# Altium PCB Board.PcbDoc
Units mil, origin at the board's own origin, x right, y up, seen from the top; angles counter-clockwise.
Board outline 2230 x 4710 mil, 2 copper layers (Top Layer, Bottom Layer); 96 components, 75 nets, 376 pads, 28 vias.
Unrouted connection lines stored in the file: 83.
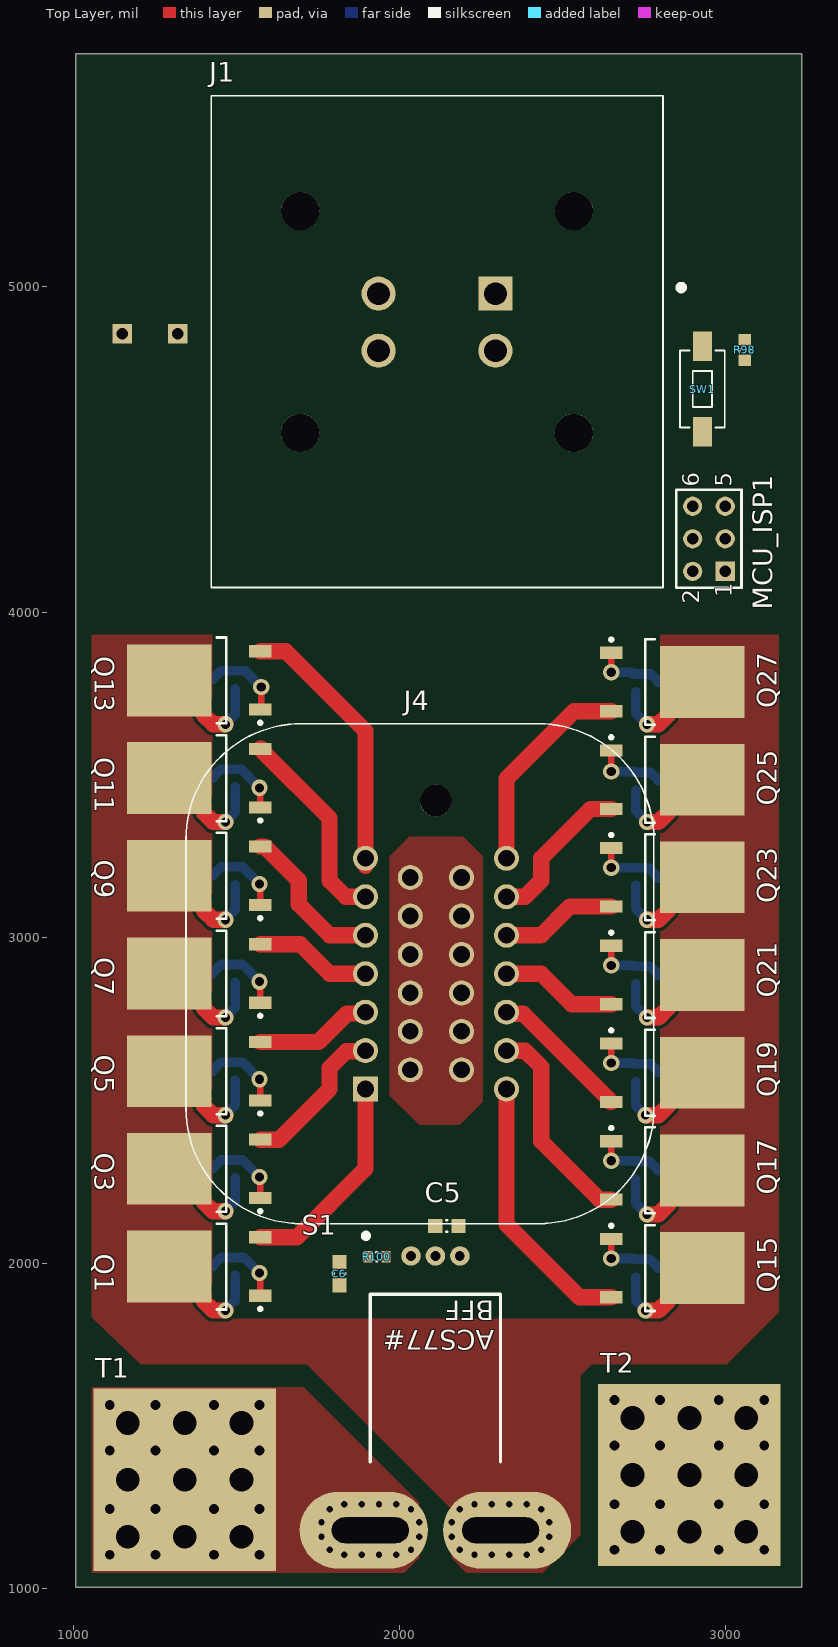
[diagram p0: Top Layer view]
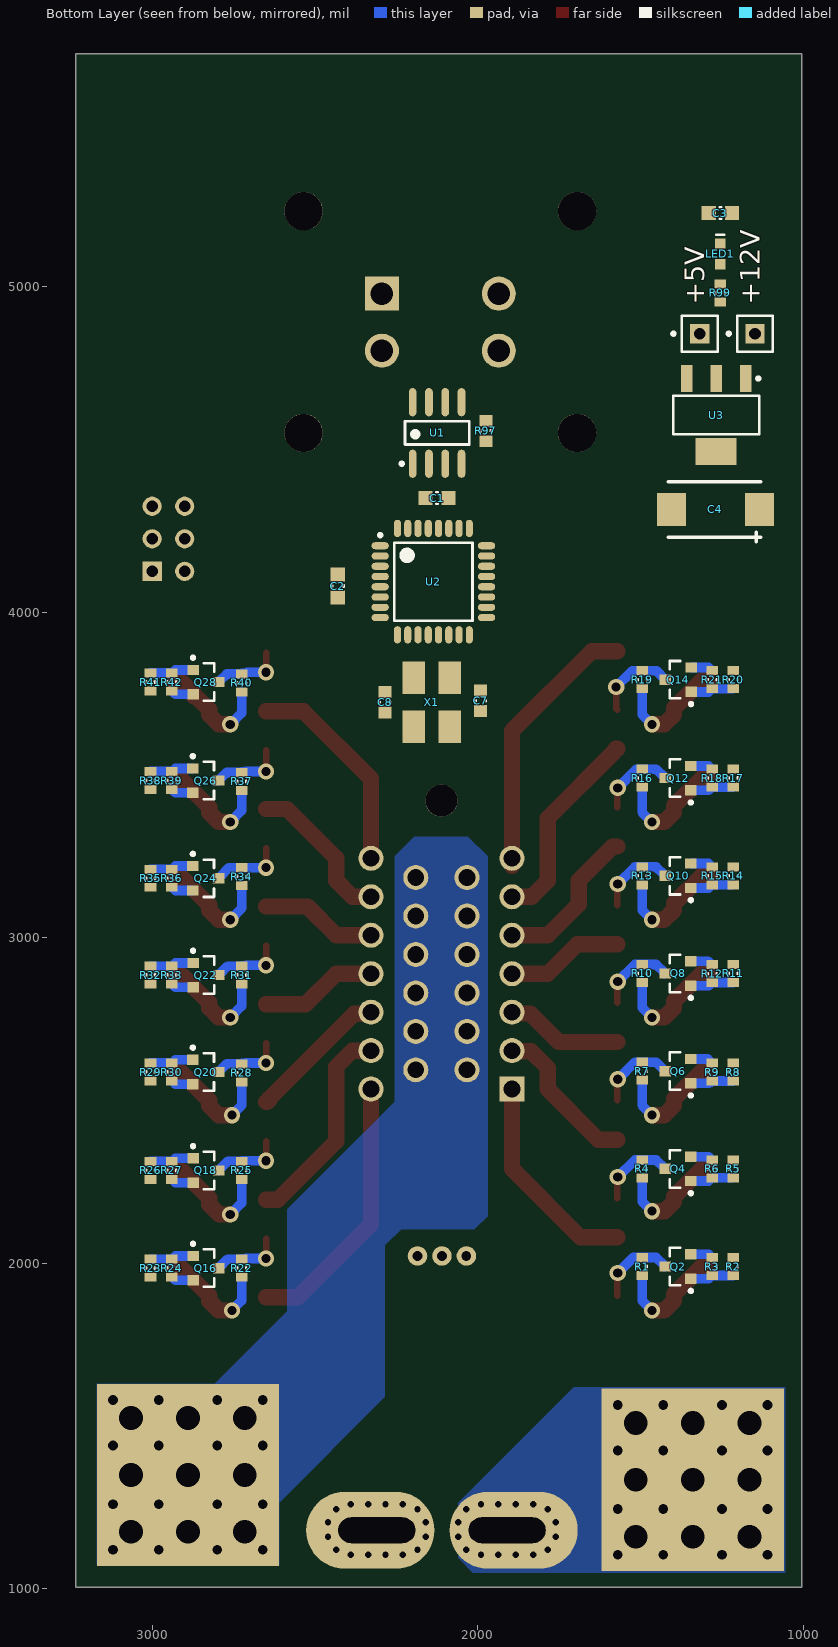
[diagram p1: Bottom Layer view, seen from below]

## Layer stack, top to bottom
Top Solder: solder mask 1, SM-003, Dk 4
Top Layer: signal copper 1.4
Dielectric 1: dielectric 12.6, FR-4, Dk 4.8
Bottom Layer: signal copper 1.4
Bottom Solder: solder mask 1, SM-003, Dk 4

## Board outline
1005,1005 3235,1005 3235,5715 1005,5715

## Design rules (kind name [scope] priority, off if disabled: settings)
Clearance [All] p1: gap=10 ignorepadtopadclearanceinfootprint=FALSE except(0: Arc-Hole Track-Hole SMDPad-Hole THPad-Hole Via-Hole Fill-Hole Poly-Hole Region-Hole Text-Hole)
PlaneConnect [All] p1: planeconnectstyle=Direct reliefexpansion=20 reliefentries=4 reliefconductorwidth=10 reliefairgap=10
PolygonConnect [All] p1: connectstyle=Direct reliefconductorwidth=10 reliefentries=4 polygonreliefangle="90 Angle" airgapwidth=10
RoutingVias [All] p1: holewidth=28 width=50 viastyle="Through Hole" minholewidth=28 minwidth=50 maxholewidth=28 maxwidth=50
SolderMaskExpansion [All] p1: expansion=4
Width [All] p1: maxlimit=50 minlimit=20 preferedwidth=30 minimp=50.000000 maximp=50.000000 favimp=50.000000
29 further rules are at their usual default settings.

## Classes and differential pairs
component class PowerSupply: +5V C3 C4 LED1 R99 U3
component class MOSFETs: Q1 Q2 Q3 Q4 Q5 Q6 Q7 Q8 Q9 Q10 Q11 Q12 Q13 Q14 Q15 Q16 Q17 Q18 Q19 Q20 Q21 Q22 Q23 Q24 Q25 Q26 Q27 Q28 R1 R2 R3 R4 R5 R6 R7 R8 R9 R10 R11 R12 R13 R14 R15 R16 R17 R18 R19 R20 R21 R22 R23 R24 R25 R26 R27 R28 R29 R30 R31 R32 R33 R34 R35 R36 R37 R38 R39 R40 R41 R42
component class MCU: C1 C2 C7 C8 MCU_ISP1 R97 R98 SW1 U1 U2 X1
component class ConnectorIn: +12V C5 C6 J1 R100 S1 T1 T2

## Components (designator, comment, footprint, x,y, rotation, side; value= is the part's Value field where it differs from the comment)
+5V "5v Supply" PIN1 1318.51,4855 r90 bottom (schematic designator J3)
+12V "12v Supply" PIN1 1148.51,4855 r90 bottom (schematic designator J2)
C1 "CAP 100nF 16V 0603(1608)" CAPC0603(1608)100_M 2125,4350 r180 bottom value=100nF
C2 "CAP 100nF 16V 0603(1608)" CAPC0603(1608)100_M 2430,4080 r90 bottom value=100nF
C3 "CAP 330nF 16V 0603(1608)" CAPC0603(1608)100_M 1255,5225 r0 bottom value=330nF
C4 "TantCap" "TantCap_2917 (7343)" 1270,4315 r0 bottom
C5 "CAP 100nF 16V 0603(1608)" CAPC0603(1608)100_M 2145,2115 r0 top value=100nF
C6 "CAP 10nF 16V 0603(1608)" CAPC0603(1608)100_M 1815,1967.99 r270 top value=10nF
C7 "CAP 22pF 16V 0603(1608)" CAPC0603(1608)100_N 1991.26,3727.61 r270 bottom value=22pF
C8 "CAP 22pF 16V 0603(1608)" CAPC0603(1608)100_N 2284.76,3723 r90 bottom value=22pF
J1 "DT15-4P" TE_DT15-4P 2114.92,4890.35 r180 top
J4 "6473418-1" TE_6473418-1 1895,2535 r90 top
LED1 "2V 30mA 0603 Green" 0603_A 1255,5100 r270 bottom
MCU_ISP1 "Header 3X2" HDR2X3 3000,4125 r90 top
Q1 "SPD30P06P G" INF-PG-TO252-3-1_N 1385,1990 r180 top
Q2 "NTR4501NT1G" ONSC-SOT-23-3-318-08_V 1385,1990 r0 bottom
Q3 "SPD30P06P G" INF-PG-TO252-3-1_N 1385,2290 r180 top
Q4 "NTR4501NT1G" ONSC-SOT-23-3-318-08_V 1385,2290 r0 bottom
Q5 "SPD30P06P G" INF-PG-TO252-3-1_N 1385,2590 r180 top
Q6 "NTR4501NT1G" ONSC-SOT-23-3-318-08_V 1385,2590 r0 bottom
Q7 "SPD30P06P G" INF-PG-TO252-3-1_N 1385,2890 r180 top
Q8 "NTR4501NT1G" ONSC-SOT-23-3-318-08_V 1385,2890 r0 bottom
Q9 "SPD30P06P G" INF-PG-TO252-3-1_N 1385,3190 r180 top
Q10 "NTR4501NT1G" ONSC-SOT-23-3-318-08_V 1385,3190 r0 bottom
Q11 "SPD30P06P G" INF-PG-TO252-3-1_N 1385,3490 r180 top
Q12 "NTR4501NT1G" ONSC-SOT-23-3-318-08_V 1385,3490 r0 bottom
Q13 "SPD30P06P G" INF-PG-TO252-3-1_N 1385,3790 r180 top
Q14 "NTR4501NT1G" ONSC-SOT-23-3-318-08_V 1384.37,3792.24 r0 bottom
Q15 "SPD30P06P G" INF-PG-TO252-3-1_N 2837.01,1985.24 r0 top
Q16 "NTR4501NT1G" ONSC-SOT-23-3-318-08_V 2835,1985 r180 bottom
Q17 "SPD30P06P G" INF-PG-TO252-3-1_N 2837.01,2285.24 r0 top
Q18 "NTR4501NT1G" ONSC-SOT-23-3-318-08_V 2835,2285 r180 bottom
Q19 "SPD30P06P G" INF-PG-TO252-3-1_N 2837.01,2585.24 r0 top
Q20 "NTR4501NT1G" ONSC-SOT-23-3-318-08_V 2835.63,2587.4 r180 bottom
Q21 "SPD30P06P G" INF-PG-TO252-3-1_N 2837.01,2885.24 r0 top
Q22 "NTR4501NT1G" ONSC-SOT-23-3-318-08_V 2835,2885 r180 bottom
Q23 "SPD30P06P G" INF-PG-TO252-3-1_N 2837.01,3185.24 r0 top
Q24 "NTR4501NT1G" ONSC-SOT-23-3-318-08_V 2835.63,3182.4 r180 bottom
Q25 "SPD30P06P G" INF-PG-TO252-3-1_N 2837.01,3485.24 r0 top
Q26 "NTR4501NT1G" ONSC-SOT-23-3-318-08_V 2835.63,3482.4 r180 bottom
Q27 "SPD30P06P G" INF-PG-TO252-3-1_N 2837.01,3785.24 r0 top
Q28 "NTR4501NT1G" ONSC-SOT-23-3-318-08_V 2835,3785 r180 bottom
R1 "1K 5% 0603(1608)" RESC0603(1608)_L 1495,1990 r270 bottom value="1000.00 Ohm"
R2 "10R 5% 0603" RESC0603(1608)_L 1215,1990 r90 bottom value="10.00 Ohm"
R3 "1K 5% 0603" RESC0603(1608)_L 1280,1990 r270 bottom value="1000.00 Ohm"
R4 "1K 5% 0603(1608)" RESC0603(1608)_L 1495,2290 r270 bottom value="1000.00 Ohm"
R5 "10R 5% 0603" RESC0603(1608)_L 1215.33,2290 r90 bottom value="10.00 Ohm"
R6 "1K 5% 0603" RESC0603(1608)_L 1280,2290 r270 bottom value="1000.00 Ohm"
R7 "1K 5% 0603(1608)" RESC0603(1608)_L 1495,2590 r270 bottom value="1000.00 Ohm"
R8 "10R 5% 0603" RESC0603(1608)_L 1215,2587.4 r90 bottom value="10.00 Ohm"
R9 "1K 5% 0603" RESC0603(1608)_L 1280,2587.4 r270 bottom value="1000.00 Ohm"
R10 "1K 5% 0603(1608)" RESC0603(1608)_L 1495,2890 r270 bottom value="1000.00 Ohm"
R11 "10R 5% 0603" RESC0603(1608)_L 1215,2890 r90 bottom value="10.00 Ohm"
R12 "1K 5% 0603" RESC0603(1608)_L 1280,2889.33 r270 bottom value="1000.00 Ohm"
R13 "1K 5% 0603(1608)" RESC0603(1608)_L 1495,3190 r270 bottom value="1000.00 Ohm"
R14 "10R 5% 0603" RESC0603(1608)_L 1215,3190 r90 bottom value="10.00 Ohm"
R15 "1K 5% 0603" RESC0603(1608)_L 1280,3190 r270 bottom value="1000.00 Ohm"
R16 "1K 5% 0603(1608)" RESC0603(1608)_L 1495,3490 r270 bottom value="1000.00 Ohm"
R17 "10R 5% 0603" RESC0603(1608)_L 1215,3490 r90 bottom value="10.00 Ohm"
R18 "1K 5% 0603" RESC0603(1608)_L 1280,3490 r270 bottom value="1000.00 Ohm"
R19 "1K 5% 0603(1608)" RESC0603(1608)_L 1495,3792.24 r270 bottom value="1000.00 Ohm"
R20 "10R 5% 0603" RESC0603(1608)_L 1215,3792.24 r90 bottom value="10.00 Ohm"
R21 "1K 5% 0603" RESC0603(1608)_L 1280,3792.24 r270 bottom value="1000.00 Ohm"
R22 "1K 5% 0603(1608)" RESC0603(1608)_L 2725,1985 r270 bottom value="1000.00 Ohm"
R23 "10R 5% 0603" RESC0603(1608)_L 3005,1985 r270 bottom value="10.00 Ohm"
R24 "1K 5% 0603" RESC0603(1608)_L 2940,1985 r90 bottom value="1000.00 Ohm"
R25 "1K 5% 0603(1608)" RESC0603(1608)_L 2725,2285 r270 bottom value="1000.00 Ohm"
R26 "10R 5% 0603" RESC0603(1608)_L 3005,2285 r270 bottom value="10.00 Ohm"
R27 "1K 5% 0603" RESC0603(1608)_L 2940,2285 r90 bottom value="1000.00 Ohm"
R28 "1K 5% 0603(1608)" RESC0603(1608)_L 2725,2585 r270 bottom value="1000.00 Ohm"
R29 "10R 5% 0603" RESC0603(1608)_L 3005,2587.4 r270 bottom value="10.00 Ohm"
R30 "1K 5% 0603" RESC0603(1608)_L 2940,2587.4 r90 bottom value="1000.00 Ohm"
R31 "1K 5% 0603(1608)" RESC0603(1608)_L 2725,2885 r270 bottom value="1000.00 Ohm"
R32 "10R 5% 0603" RESC0603(1608)_L 3005,2885 r270 bottom value="10.00 Ohm"
R33 "1K 5% 0603" RESC0603(1608)_L 2940,2885 r90 bottom value="1000.00 Ohm"
R34 "1K 5% 0603(1608)" RESC0603(1608)_L 2725,3187.44 r270 bottom value="1000.00 Ohm"
R35 "10R 5% 0603" RESC0603(1608)_L 3005,3182.4 r270 bottom value="10.00 Ohm"
R36 "1K 5% 0603" RESC0603(1608)_L 2940,3182.4 r90 bottom value="1000.00 Ohm"
R37 "1K 5% 0603(1608)" RESC0603(1608)_L 2725,3480 r270 bottom value="1000.00 Ohm"
R38 "10R 5% 0603" RESC0603(1608)_L 3005,3482.4 r270 bottom value="10.00 Ohm"
R39 "1K 5% 0603" RESC0603(1608)_L 2940,3482.4 r90 bottom value="1000.00 Ohm"
R40 "1K 5% 0603(1608)" RESC0603(1608)_L 2725,3782.4 r270 bottom value="1000.00 Ohm"
R41 "10R 5% 0603" RESC0603(1608)_L 3005,3785 r270 bottom value="10.00 Ohm"
R42 "1K 5% 0603" RESC0603(1608)_L 2940,3785 r90 bottom value="1000.00 Ohm"
R97 "10K 5% 0603(1608)" RESC0603(1608)_N 1975,4556.5 r90 bottom value="10000.00 Ohm"
R98 "10K 5% 0603(1608)" RESC0603(1608)_N 3060,4805 r270 top value="10000.00 Ohm"
R99 "100R 5% 0603(1608)" RESC0603(1608)_L 1255,4980 r90 bottom value="100.00 Ohm"
R100 "1K 5% 0603" RESC0603(1608)_L 1930,2020 r0 top value="1000.00 Ohm"
S1 "ACS77#" ACS77# 2110,1300 r180 top
SW1 "434111050826" 434111050826 2930,4685 r270 top
T1 "PowerScrewTerminal" WE_REDCUBE_74650195R 1340,1335 r0 top
T2 "PowerScrewTerminal" WE_REDCUBE_74650195R 2890,1350 r0 top
U1 "MCP2551-I/SN" SOIC-SN8_N 2125,4550 r90 bottom
U2 "ATmega64M1-AU" 32A_L 2136.26,4093.39 r180 bottom
U3 "LD1117S50TR" SOT-223_L 1267.96,4605 r270 bottom
X1 "CYRYSTAL_SMD-4" SMD-4_CRYSTAL_5x3.2mm 2141.26,3723 r270 bottom

## Footprints (in the part's own frame and the unit in brackets; to place one, negate y for a bottom-side part, rotate by r counter-clockwise, add the part's x,y. Pads: shape width x height; smd on the part's side, far side on the other; paste and mask are expansions set on the pad)
32A_L [mm] "Thin QFP, 32-Leads, Body 7x7mm, Pitch 0.8mm, IPC High Density"
  oval 1.35x0.55 smd: 1(-4.15,2.8) 2(-4.15,2) 3(-4.15,1.2) 4(-4.15,0.4) 5(-4.15,-0.4) 6(-4.15,-1.2) 7(-4.15,-2) 8(-4.15,-2.8) 17(4.15,-2.8) 18(4.15,-2) 19(4.15,-1.2) 20(4.15,-0.4) 21(4.15,0.4) 22(4.15,1.2) 23(4.15,2) 24(4.15,2.8)
  oval 0.55x1.35 smd: 9(-2.8,-4.15) 10(-2,-4.15) 11(-1.2,-4.15) 12(-0.4,-4.15) 13(0.4,-4.15) 14(1.2,-4.15) 15(2,-4.15) 16(2.8,-4.15) 25(2.8,4.15) 26(2,4.15) 27(1.2,4.15) 28(0.4,4.15) 29(-0.4,4.15) 30(-1.2,4.15) 31(-2,4.15) 32(-2.8,4.15)
  silkscreen extent -4.28,-3.05 3.05,3.75, body extent -3.5,-3.5 3.5,3.5, height 1.2
0603_A [mm] "Chip LED, 2-Leads, Body 1.6x0.8mm, IPC Medium Density"
  rect 0.8x0.8 smd: 1(-0.8,0) 2(0.8,0)
  silkscreen extent -1.5,-0.3 -1.5,0.3, body extent -0.8,-0.4 0.8,0.4, height 0.7
434111050826 [mm] "6.0*3.5mm vertical type, SMD, height 5.0mm, white actuator, 260gf, T&R"
  rect 2.3x1.5 smd: 1(-3.35,0) 2(3.35,0)
  silkscreen extent -3,-1.75 3,1.75, body extent -4,-1.75 4,1.75, height 5
ACS77# [mil]
  round 60 hole 30: 1(-75,-722.52) 2(0,-722.52) 3(75,-722.52)
  round 40 hole 19.68: 4(50,95) 4(50,140) 4(75,180) 4(75,55) 4(120,195) 4(120,40) 4(173.33,195) 4(173.33,40) 4(226.67,195) 4(226.67,40) 4(280,40) 4(280,195) 4(325,55) 4(325,180) 4(350,95) 4(350,140) 5(-350,95) 5(-350,140) 5(-325,55) 5(-325,180) 5(-280,40) 5(-280,195) 5(-226.67,195) 5(-226.67,40) 5(-173.33,195) 5(-173.33,40) 5(-120,195) 5(-120,40) 5(-75,180) 5(-75,55) 5(-50,95) 5(-50,140)
  oval 393.7x236.22 hole 78.74 slot 236.22 at 0 deg copper offset 20,0: 4(200,120)
  oval 393.7x236.22 hole 78.74 slot 236.22 at 0 deg copper offset -20,0: 5(-200,120)
  silkscreen extent -200,-605 200,-90, body extent -280,-605 280,140, height 275
CAPC0603(1608)100_M [mm] "Chip Capacitor, Body 1.6x0.8mm, Height 1.0mm, IPC Low Density"
  rect 1.1x1.1 smd: 1(-0.9,0) 2(0.9,0)
  silkscreen extent -0.05,-0.45 0.05,0.45, body extent -0.87,-0.47 0.88,0.48, height 1
CAPC0603(1608)100_N [mm] "Chip Capacitor, Body 1.6x0.8mm, Height 1.0mm, IPC Medium Density"
  rect 0.9x1 smd: 1(-0.8,0) 2(0.8,0)
  silkscreen extent -0.05,-0.4 0.05,0.4, body extent -0.87,-0.48 0.88,0.47, height 1
HDR2X3 [mm] "Connector; Header; 3x2 Position"
  rect 1.5x1.5 hole 0.9: 1(0,0)
  round 1.5 hole 0.9: 2(0,2.54) 3(2.54,0) 4(2.54,2.54) 5(5.08,0) 6(5.08,2.54)
  silkscreen extent -1.27,-1.27 6.35,3.81
INF-PG-TO252-3-1_N [mm] "DPAK, 3-Leads, Body 6.525x6.12mm, Pitch 2.28mm, IPC Medium Density"
  rect 1.75x0.95 smd: 1(-4.75,2.28) 3(-4.75,-2.28)
  rect 6.6x5.6 smd: 2(2.35,0)
  silkscreen extent -4.87,-3.35 -1.35,3.43, body extent -2.1,-3.32 4.12,3.32, height 2.35
ONSC-SOT-23-3-318-08_V [mm] "SOT23, 3-Leads, Body 2.92x1.3mm, Pitch 0.95mm"
  rect 0.9x0.8 smd: 1(-1,0.95) 2(-1,-0.95) 3(1,0)
  silkscreen extent -1.12,-1.46 0.65,2.02, body extent -0.65,-1.46 0.65,1.46, height 1.11
PIN1 [mm] "Connector; Plug"
  rect 1.5x1.5 hole 0.9: 1(0,0)
  silkscreen extent -1.4,-1.4 1.4,2.18
RESC0603(1608)_L [mm] "Chip Resistor, Body 1.6x0.8mm, IPC High Density"
  rect 0.7x0.9 smd: 1(-0.7,0) 2(0.7,0)
  silkscreen extent -0.05,-0.35 0.05,0.35, body extent -0.85,-0.47 0.85,0.47, height 0.6
RESC0603(1608)_N [mm] "Chip Resistor, Body 1.6x0.8mm, IPC Medium Density"
  rect 0.9x1 smd: 1(-0.8,0) 2(0.8,0)
  silkscreen extent -0.05,-0.4 0.05,0.4, body extent -0.85,-0.47 0.85,0.47, height 0.6
SMD-4_CRYSTAL_5x3.2mm [mil]
  rect 100x70 smd: 1(-75,-55) 2(75,-55) 3(75,55) 4(-75,55)
  body extent -98,-63 98,63, height 47
SOIC-SN8_N [mm] "SOIC, 8-Leads, Body 4.9x3.9mm, Pitch 1.27mm, IPC Medium Density"
  oval 2.2x0.6 smd: 1(-2.4,1.905) 2(-2.4,0.635) 3(-2.4,-0.635) 4(-2.4,-1.905) 5(2.4,-1.905) 6(2.4,-0.635) 7(2.4,0.635) 8(2.4,1.905)
  silkscreen extent -2.52,-2.5 0.9,2.88, body extent -2,-2.5 2,2.5, height 1.75
SOT-223_L [mm] "SOT223, 4-Leads, Body 6.5x3.5mm, Pitch 2.3mm, Lead Span 7mm, IPC High Density"
  rect 2.1x0.9 smd: 1(-2.85,2.3) 2(-2.85,0) 3(-2.85,-2.3)
  rect 2.1x3.2 smd: 4(2.85,0)
  silkscreen extent -2.97,-3.35 1.5,3.42, body extent -1.85,-3.35 1.85,3.35, height 1.8
"TantCap_2917 (7343)" [mil]
  rect 90x100 smd: 1(-135,0) 2(135,0)
  silkscreen extent -140,-85 145,100, body extent -140,-85 145,85, height 120
TE_6473418-1 [mm]
  rect 1.95x1.95 hole 1.3: 1(0,0)
  round 1.95 hole 1.3: 2(3,0) 3(6,0) 4(9,0) 5(12,0) 6(15,0) 7(18,0) 8(1.5,-3.5) 9(4.5,-3.5) 10(7.5,-3.5) 11(10.5,-3.5) 12(13.5,-3.5) 13(16.5,-3.5) 14(1.5,-7.5) 15(4.5,-7.5) 16(7.5,-7.5) 17(10.5,-7.5) 18(13.5,-7.5) 19(16.5,-7.5) 20(0,-11) 21(3,-11) 22(6,-11) 23(9,-11) 24(12,-11) 25(15,-11) 26(18,-11)
  round 2.5 hole 2.5 unplated: None(22.5,-5.5)
  silkscreen extent -11.65,-22.5 28.5,14, body extent -10.55,-22.46 28.45,14.04, height 24.6
TE_DT15-4P [mm]
  rect 2.655x2.655 hole 1.77: 1(-4.56,-2.225)
  round 2.655 hole 1.77: 2(-4.56,2.225) 3(4.56,2.225) 4(4.56,-2.225)
  round 2.99 hole 2.99 unplated: None(-10.67,8.645) None(-10.67,-8.655) None(10.67,8.645) None(10.67,-8.655)
  silkscreen extent -19.25,-17.65 17.62,20.7, body extent -17.63,-17.65 17.63,20.7, height 30.48
WE_REDCUBE_74650195R [mil] "Uses the https://au.rs-online.com/web/p/power-element-bushes/1424113/"
  round 60 hole 30: 1(-230,-230) 1(-230,-90) 1(-230,90) 1(-230,230) 1(-90,-230) 1(-90,-90) 1(-90,90) 1(-90,230) 1(90,-230) 1(90,-90) 1(90,90) 1(90,230) 1(230,-230) 1(230,-90) 1(230,90) 1(230,230)
  round 125.98 hole 72.83: 1(-174.61,-174.61) 1(-174.61,0) 1(-174.61,174.61) 1(0,-174.61) 1(0,0) 1(0,174.61) 1(174.61,-174.61) 1(174.61,0) 1(174.61,174.61)
  rect 560x560 all layers, no hole: 1(0,0)
  body extent -197,-197 197,197, height 276

## Part data
+5V +12V: library part Socket, "Socket", LatestRevisionDate=17-Jul-2002, LatestRevisionNote="Re-released for DXP Platform.", Publisher="Altium Limited"
C1 C2 C5: library part CMP-1035-02583-1, "CAP 100nF 16V ±5% 0603 (1608 Metric) Thickness 1mm SMD", Case-EIA=0603, Case-Metric=1608, Rated Voltage="16 V", Tolerance=±5%, Max Thickness="1 mm", Technology=SMT
C3: library part CMP-1035-02670-1, "CAP 330nF 16V ±5% 0603 (1608 Metric) Thickness 1mm SMD", Case-EIA=0603, Case-Metric=1608, Rated Voltage="16 V", Tolerance=±5%, Max Thickness="1 mm", Technology=SMT
C6: library part CMP-1035-02310-1, "CAP 10nF 16V ±5% 0603 (1608 Metric) Thickness 1mm SMD", Case-EIA=0603, Case-Metric=1608, Rated Voltage="16 V", Tolerance=±5%, Max Thickness="1 mm", Technology=SMT
C7 C8: library part CMP-1035-00808-1, "CAP 22pF 16V ±5% 0603 (1608 Metric) Thickness 1mm SMD", Case-EIA=0603, Case-Metric=1608, Rated Voltage="16 V", Tolerance=±5%, Max Thickness="1 mm", Technology=SMT
J1: "DT Series 4 Position 16 AWG Flange Mount Male Pin Through Hole Receptacle Header", Package=None, Digi-Key_Part_Number=1734-1030-ND, Digi-Key_Purchase_URL=https://www.digikey.com/product-detail/en/te-connectivity-deutsch-connectors/DT15-4P/1734-1030-ND/6566594?utm_source=snapeda&utm_medium=aggregator&utm_campaign=symbol, MF="TE Connectivity", MP=DT15-4P, SnapEDA_Link=https://www.snapeda.com/parts/DT15-4P/TE%20Connectivity%20Deutsch%20Connectors/view-part/?ref=snap, TE_purchase_URL=https://www.te.com/usa-en/product-DT15-4P.html?te_bu=Cor&te_type=disp&te_campaign=seda_glo_cor-seda-global-disp-prtnr-fy19-seda-model-bom-cta_sma-317_1&elqCampaignId=32493
J4: "Conn Shrouded Header PIN 26 POS 3mm Solder ST Thru-Hole Automotive Tube", Package=None, Digi-Key_Part_Number=A121634-ND, Digi-Key_Purchase_URL=https://www.digikey.com/product-detail/en/te-connectivity-amp-connectors/6473418-1/A121634-ND/2329277?utm_source=snapeda&utm_medium=aggregator&utm_campaign=symbol, EU_RoHS_Compliance=Compliant, MF="TE Connectivity", MP=6473418-1, SnapEDA_Link=https://www.snapeda.com/parts/6473418-1/TE%20Connectivity%20AMP%20Connectors/view-part/?ref=snap, TE_purchase_URL=https://www.te.com/usa-en/product-6473418-1.html?te_bu=Cor&te_type=disp&te_campaign=seda_glo_cor-seda-global-disp-prtnr-fy19-seda-model-bom-cta_sma-317_1&elqCampaignId=32493
LED1: library part CMP-1426-00006-1, "SMD mono-color Chip LED, WL-SMCW, Bright Green", Color="Bright Green", Manufacturer="Wuerth Elektronik", PartNumber=150060VS75000, ComponentLink1Description="Manufacturer URL", ComponentLink1URL=http://www.we-online.com, ComponentLink2Description=Datasheet, ComponentLink2URL=http://katalog.we-online.com/led/datasheet/150060VS75000.pdf, PackageReference=0603_A
MCU_ISP1: "Header, 3-Pin, Dual row", LatestRevisionDate=17-Jul-2002, LatestRevisionNote="Re-released for DXP Platform.", Publisher="Altium Limited"
Q1 Q3 Q5 Q7 Q9 Q11 Q13 Q15 Q17 Q19 Q21 Q23 Q25 Q27: library part CMP-1099-00058-1, "P-Channel SIPMOS Power-Transistor, -60 V VDS, -30 A ID, -55 to 175 degC, PG-TO252-3-1, Reel, Green", Manufacturer=Infineon, ComponentLink1Description="Manufacturer URL", ComponentLink1URL=http://www.infineon.com/, ComponentLink2Description=Datasheet, ComponentLink2URL=http://www.infineon.com/dgdl/SPD30P06P_Rev.2.3_pdf.pdf?folderId=db3a30431ed1d7b2011f4042f2ff4ec5&fileId=db3a30431ed1d7b2011f404fbc7e4ef4, ComponentLink3Description="Package Specification", ComponentLink3URL=http://www.infineon.com/dgdl/TLE42744_DS_11.pdf?folderId=db3a304318f3fe290118f5a433570040&fileId=db3a304327b897500128012ccafe37d2&sId=db3a30443d67b5ca013d83f7c0ea327b, DatasheetVersion="Rev. 2.3", Green=TRUE, ID (max)="-30 A", IDpuls (max)="-120 A", Mounting Technology="Surface Mount", PackageDescription="3-Pin Plastic (Green) Transistor Single Outline Package, 6.5 x 6.12 mm Body, 2.28 mm Pitch", PackageReference=PG-TO252-3-1, PackageVersion=Jan-10, Packing=Reel, PartNumber="SPD30P06P G", Pto t (max)="125 W", QG="32 nC", RDS (on) (max)="75 mOhm", Rth="1.2 K/W", RthJC (max)="1.2 K/W", VDS (max)="-60 V", VGS(th) (max)="-4 V", VGS(th) (min)="-2.1 V"
Q2 Q4 Q6 Q8 Q10 Q12 Q14 Q16 Q18 Q20 Q22 Q24 Q26 Q28: library part CMP-1058-00732-1, "Power MOSFET, 20 V, 3.2 A, Single N-Channel, 3-Pin SOT-23, Pb-Free, Tape and Reel", Manufacturer="On Semiconductor", Package Type=SOT-23-3, Channel Polarity="N Channel", Ciss Typ (pF)=200, ComponentLink1Description="Manufacturer URL", ComponentLink1URL=http://www.onsemi.com/, ComponentLink2Description=Datasheet, ComponentLink2URL=http://www.onsemi.cn/pub_link/Collateral/NTR4501N-D.PDF, ComponentLink3Description="Package Specification", ComponentLink3URL=http://www.onsemi.cn/pub_link/Collateral/318-08.PDF, Configuration=Single, Coss Typ (pF)=80, Crss Typ (pF)=50, DatasheetVersion="Rev. 13", Mounting Technology="Surface Mount", PackageDescription="3-Pin Small Outline Transistor, Body 2.92 x 1.3 mm, Pitch 0.95 mm", PackageReference=SOT-23-3-318-08, PackageVersion="Rev. AP, 11/2009", Packing="Tape and Reel", PartNumber=NTR4501NT1G, PD Max (W)=1.25, Qrr Typ (nC)=3, RoHS=Pb-Free, V(BR)DSS Min (V)=20, VGS(th) Max (V)=1.2, VGS Max (V)=12
R1 R3 R4 R6 R7 R9 R10 R12 R13 R15 R16 R18 R19 R21 R22 R24 R25 R27 R28 R30 R31 R33 R34 R36 R37 R39 R40 R42 R100: library part CMP-1012-00074-1, "1K 0.1W 5% 0603 (1608 Metric)  SMD", Case-EIA=0603, Case-Metric=1608, Power="0.1 W", Tolerance="5 %", Technology=SMT
R2 R5 R8 R11 R14 R17 R20 R23 R26 R29 R32 R35 R38 R41: library part CMP-1012-00026-1, "10R 0.1W 5% 0603 (1608 Metric)  SMD", Case-EIA=0603, Case-Metric=1608, Power="0.1 W", Tolerance="5 %", Technology=SMT
R97 R98: library part CMP-1012-00098-1, "10K 0.1W 5% 0603 (1608 Metric)  SMD", Case-EIA=0603, Case-Metric=1608, Power="0.1 W", Tolerance="5 %", Technology=SMT
R99: library part CMP-1012-00050-1, "100R 0.1W 5% 0603 (1608 Metric)  SMD", Case-EIA=0603, Case-Metric=1608, Power="0.1 W", Tolerance="5 %", Technology=SMT
SW1: library part CMP-1459-00003-1, "WS-TASV SMD Tact Switch 6.0X3.5 mm", Manufacturer="Wuerth Elektronik", ComponentLink1Description="Manufacturer URL", ComponentLink1URL=http://www.we-online.com, ComponentLink2Description=Datasheet, ComponentLink2URL=http://katalog.we-online.de/em/datasheet/434111050826.pdf, NoPins=02, PackageReference=434111050826, PartNumber=434111050826
U1: library part CMP-0186-00138-2, "High-Speed CAN Transceiver, 8-Pin SOIC, Industrial Temperature", Code_IPC=SOIC127P600-8, Code_JEDEC=MS-012, ComponentLink1Description="Manufacturer URL", ComponentLink1URL=http://www.microchip.com/, ComponentLink2Description=Datasheet, ComponentLink2URL=http://ww1.microchip.com/downloads/en/DeviceDoc/21667F.pdf, ComponentLink3Description="Package Specification", ComponentLink3URL=http://www.microchip.com/stellent/groups/techpub_sg/documents/packagingspec/en012702.pdf, DatasheetVersion="revF, Jul-2010", PackageDescription="8-Lead Plastic Small Outline (SN) - Narrow, 3.90mm Body [SOIC]", PackageReference=SOIC-SN8, PackageVersion="revBB, Aug-2009", RevisionNote="URLs added. DatasheetVersion updated."
U2: library part CMP-0096-00131-2, "8-bit AVR Microcontroller, 2.7-5.5V, 16MHz, 64KB Flash, 2KB EEPROM, 4KB SRAM, Industrial Grade (-40° to +85°C), 32-Pin TQFP", Code_JEDEC=MS-026-ABA, ComponentLink1Description="Manufacturer URL", ComponentLink1URL=http://www.atmel.com/, ComponentLink2Description="ATmega16M1/32M1/64M1 Datasheet", ComponentLink2URL=http://www.atmel.com/dyn/resources/prod_documents/doc8209.pdf, ComponentLink3Description="ATmega16M1/32M1/64M1 Summary", ComponentLink3URL=http://www.atmel.com/dyn/resources/prod_documents/8209S.pdf, DatasheetVersion="revD, Nov-2010", PackageDescription="32-Lead, 7x7x1.0 mm Body, 0.8mm Lead Pitch, Thin Profile Plastic Quad Flat Package (TQFP)", PackageReference=32A, PackageVersion="revC, Oct-2010", RevisionNote="DatasheetVersion & PackageVersion updated. URLs added."
U3: library part CMP-0244-00312-1, "Fixed Low Drop Positive Voltage Regulator, 5V, 4-Pin SOT-223, Tape and Reel", ComponentLink1Description="Manufacturer URL", ComponentLink1URL=http://www.st.com, ComponentLink2Description=Datasheet, ComponentLink2URL=http://www.st.com/internet/com/TECHNICAL_RESOURCES/TECHNICAL_LITERATURE/DATASHEET/CD00000544.pdf, DatasheetVersion=1/11/2011, PackageDescription="4-Pin SOT-223 Package, 6.5 x 3.5 mm Body, 2.3 mm Pitch, 7 mm Lead Span", PackageReference=SOT-223, PackageVersion=2010

## Via types
v1: diameter 50, hole 28, Top Layer to Bottom Layer, 28 vias

## Nets (pads, with @x,y where several pads share a name; then routed paths per layer and width w, separated by ;. In a path a pad name is that pad's centre, name@x,y a point inside that pad or via, vN(x,y) a via of type N, cw(c..) or ccw(c..) an arc to the next point about the centre after c; other vN are vias at no path point)
+5: +5V.1 C1.2 C2.2 C4.2 C5.2 MCU_ISP1.2 R98.2 R99.1 S1.1 U1.3 U2.4 U2.19 U3.2 U3.4
+12_HC: Q1.2 Q3.2 Q5.2 Q7.2 Q9.2 Q11.2 Q13.2 Q15.2 Q17.2 Q19.2 Q21.2 Q23.2 Q25.2 Q27.2 R1.2 R4.2 R7.2 R10.2 R13.2 R16.2 R19.2 R22.2 R25.2 R28.2 R31.2 R34.2 R37.2 R40.2 S1.5 | length 5069.1
  Top Layer w30: v1(2755,2455) 2758.83,2458.83 2772.97,2458.83 v1@2774.38,2460.24 ; Q27.2@2875,3730.71 Q27.2
  Top Layer w50: Q1.2 1312.17,1990 1397.4,1904.76 1397.4,1885.08 1427.48,1855 v1(1465,1855) ; Q3.2 1312.17,2290 1397.4,2204.76 1397.4,2189.29 1426.69,2160 v1(1465,2160) ; Q5.2 1312.17,2590 1397.4,2504.76 1397.4,2485.08 1427.48,2455 v1(1465,2455) ; Q7.2 1312.17,2890 1397.4,2804.76 1397.4,2785.08 1427.48,2755 v1(1465,2755) ; Q9.2 1312.17,3190 1397.4,3104.76 1397.4,3085.08 1427.48,3055 v1(1465,3055) ; Q11.2 1312.17,3490 1397.4,3404.76 1397.4,3385.08 1427.48,3355 v1(1465,3355) ; Q13.2 1312.17,3790 1397.4,3704.76 1397.4,3685.08 1427.48,3655 v1(1465,3655) ; v1(2755,1855) 2795.32,1855 2824.61,1884.29 2824.61,1900 2909.84,1985.24 Q15.2 ; v1(2755,2455) 2795.32,2455 2824.61,2484.29 2824.61,2500 2909.84,2585.24 Q19.2 ; v1(2760,2150) 2794.29,2150 2824.61,2180.31 2824.61,2200 2909.84,2285.24 Q17.2 ; v1(2760,2755) 2795.32,2755 2824.61,2784.29 2824.61,2800 2909.84,2885.24 Q21.2 ; v1(2760,3055) 2795.32,3055 2824.61,3084.29 2824.61,3100 2909.84,3185.24 Q23.2 ; v1(2760,3355) 2795.32,3355 2824.61,3384.29 2824.61,3400 2909.84,3485.24 Q25.2 ; v1(2760,3655) 2795.32,3655 2824.61,3684.29 2824.61,3700 2909.84,3785.24 Q27.2
  Bottom Layer w30: v1(1465,1855) 1495,1885 R1.2 ; v1(1465,2160) 1495,2190 R4.2 ; v1(1465,2455) 1495,2485 R7.2 R7.2@1493.5,2562.44 ; v1(1465,2755) 1495,2785 R10.2 ; v1(1465,3055) 1495,3085 R13.2 ; v1(1465,3355) 1495,3385 R16.2 ; v1(1465,3655) 1495,3685 R19.2 ; R22.2 2725,1885 v1(2755,1855) ; R25.2 2725,2185 v1(2760,2150) ; R28.2 2725,2485 v1(2755,2455) ; R31.2 2725,2790 v1(2760,2755) ; R34.2 2725,3090 v1(2760,3055) ; R37.2 2725,3390 v1(2760,3355) ; R40.2 2725,3690 v1(2760,3655)
+12_LC: +12V.1 C3.2 J1.4 U3.3
CAN_RS: R97.2 U1.8
CAN_RX: U1.4 U2.7
CAN_TX: U1.1 U2.6
CURRENT_SENSE: C6.1 R100.1 U2.12
GND: C1.1 C2.1 C3.1 C4.1 C5.1 C6.2 C8.2 J1.1 J4.8 J4.9 J4.10 J4.11 J4.12 J4.13 J4.14 J4.15 J4.16 J4.17 J4.18 J4.19 LED1.1 MCU_ISP1.6 Q2.2 Q4.2 Q6.2 Q8.2 Q10.2 Q12.2 Q14.2 Q16.2 Q18.2 Q20.2 Q22.2 Q24.2 Q26.2 Q28.2 R3.1 R6.1 R9.1 R12.1 R15.1 R18.1 R21.1 R24.1 R27.1 R30.1 R33.1 R36.1 R39.1 R42.1 R97.1 S1.2 SW1.2 T2.1 U1.2 U2.5 U2.20 U3.1 X1.4 | length 974.7
  Bottom Layer w30: R3.1 1281.5,2017.56 1291.34,2027.4 Q2.2 ; R6.1 1281.5,2317.56 1291.34,2327.4 Q4.2 ; R9.1 1281.5,2614.96 1293.94,2627.4 Q6.2 ; R12.1 1281.5,2916.89 1292.01,2927.4 Q8.2 ; R15.1 1281.5,3217.56 1291.34,3227.4 Q10.2 ; R18.1 1281.5,3517.56 1291.34,3527.4 Q12.2 ; R21.1 1281.5,3819.8 1291.34,3829.65 Q14.2 ; Q16.2 2928.66,1947.6 2938.5,1957.44 R24.1 ; Q18.2 2928.66,2247.6 2938.5,2257.44 R27.1 ; Q22.2 2928.66,2847.6 2938.5,2857.44 R33.1 ; Q28.2 2928.66,3747.6 2938.5,3757.44 R42.1 ; Q20.2 2928.66,2550 2938.5,2559.84 R30.1 ; Q24.2 2928.66,3145 2938.5,3154.84 R36.1 ; Q26.2 2928.66,3445 2938.5,3454.84 R39.1
MCU_CRYSTAL_1: C7.1 U2.10 X1.1
MCU_CRYSTAL_2: C8.1 U2.11 X1.3
MCU_RESET: MCU_ISP1.5 R98.1 SW1.1 U2.31
MISO: MCU_ISP1.1 U2.8
MOSFET_A_CTRL: R2.2 U2.29
MOSFET_B_CTRL: R5.2 U2.32
MOSFET_C_CTRL: R8.2 U2.1
MOSFET_D_CTRL: R11.2 U2.2
MOSFET_E_CTRL: R14.2 U2.13
MOSFET_F_CTRL: R17.2 U2.14
MOSFET_G_CTRL: R20.2 U2.15
MOSFET_H_CTRL: R23.2 U2.16
MOSFET_I_CTRL: R26.2 U2.23
MOSFET_K_CTRL: R29.2 R32.2 U2.24 U2.26
MOSFET_L_CTRL: R35.2 U2.27
MOSFET_M_CTRL: R38.2 U2.30
MOSFET_N_CTRL: R41.2 U2.3
MOSI: MCU_ISP1.4 U2.9
NetC7_2: C7.2 X1.2
NetJ1_2: J1.2 U1.6
NetJ1_3: J1.3 U1.7
NetJ4_1: J4.1 Q1.3 | length 655.1
  Top Layer w50: Q1.3 1684.76,2079.76 1895,2290 J4.1
NetJ4_2: J4.2 Q3.3 | length 474.3
  Top Layer w50: Q3.3 1629.76,2379.76 1785,2535 1785,2600 1836.38,2651.38 1893.27,2651.38 J4.2
NetJ4_3: J4.3 Q5.3 | length 360.9
  Top Layer w50: Q5.3 1751.14,2679.76 1838.62,2767.24 1891.02,2767.24 J4.3
NetJ4_4: J4.4 Q7.3 | length 366.2
  Top Layer w10: J4.4@1890.91,2885.24 J4.4
  Top Layer w50: Q7.3 1694.57,2979.76 1785,2889.33 J4.4
NetJ4_5: J4.5 Q9.3 | length 485.5
  Top Layer w50: Q9.3 1585.79,3279.76 1690,3175.55 1690,3102.44 1785,3007.44 J4.5 J4.5@1890.16,3012.28
NetJ4_6: J4.6 Q11.3 | length 625.3
  Top Layer w50: Q11.3 1575.16,3579.76 1581.46,3573.46 1581.46,3570.32 1785,3366.77 1785,3175 1834.45,3125.55 J4.6
NetJ4_7: J4.7 Q13.3 | length 838.8
  Top Layer w50: Q13.3 1650.24,3879.76 1895,3635 J4.7@1895,3220.55
NetJ4_20: J4.20 Q15.3 | length 829.9
  Top Layer w50: J4.20 2328.07,2120 2552.6,1895.47 Q15.3
NetJ4_21: J4.21 Q17.3 | length 645.1
  Top Layer w50: J4.21 2385,2653.11 2435,2603.11 2435,2375 2614.53,2195.47 Q17.3
NetJ4_22: J4.22 Q19.3 | length 438
  Top Layer w50: J4.22 2333.19,2766.1 2379.37,2766.1 2640.55,2504.92 2640.55,2501.77 2646.85,2495.47 Q19.3
NetJ4_23: J4.23 Q21.3 | length 360.8
  Top Layer w50: J4.23 2435,2889.33 2528.86,2795.47 Q21.3
NetJ4_24: J4.24 Q23.3 | length 358.4
  Top Layer w50: J4.24 2435,3007.44 2523.03,3095.47 Q23.3
NetJ4_25: J4.25 Q25.3 | length 480.4
  Top Layer w10: J4.25@2328.07,3102.44 J4.25@2332.88,3107.25
  Top Layer w50: J4.25 2385,3125.55 2435,3175.55 2435,3243.66 2586.81,3395.47 Q25.3
NetJ4_26: J4.26 Q27.3 | length 659.1
  Top Layer w10: J4.26@2328.07,3220.55 J4.26@2332.88,3225.36
  Top Layer w50: J4.26 2328.07,3488.07 2535.47,3695.47 Q27.3
NetLED1_2: LED1.2 R99.2
NetQ1_1: Q1.1 Q2.3 R1.1 | length 248.5
  Top Layer w20: v1(1570,1970) 1572.01,1967.99 Q1.1
  Bottom Layer w30: Q2.3 1426.34,1990 1427.09,1990.75 1427.09,1992.72 1451.93,2017.56 R1.1 1522.44,2017.56 v1(1570,1970)
NetQ2_1: Q2.1 R2.1 R3.2 | length 134.7
  Bottom Layer w30: R2.1 R3.2 1281.5,1962.44 1291.34,1952.6 Q2.1
NetQ3_1: Q3.1 Q4.3 R4.1 | length 245.6
  Top Layer w20: v1(1570,2265) 1572.01,2262.99 Q3.1
  Bottom Layer w30: Q4.3 1426.34,2290 1427.09,2290.75 1427.09,2292.72 1451.93,2317.56 R4.1 1517.44,2317.56 v1(1570,2265)
NetQ4_1: Q4.1 R5.1 R6.2 | length 134.4
  Bottom Layer w30: R5.1 R6.2 1281.5,2262.44 1291.34,2252.6 Q4.1
NetQ5_1: Q5.1 Q6.3 R7.1 | length 245.6
  Top Layer w20: v1(1570,2565) 1572.01,2562.99 Q5.1
  Bottom Layer w30: Q6.3 1426.34,2590 1427.09,2590.75 1427.09,2592.72 1451.93,2617.56 R7.1 1517.44,2617.56 v1(1570,2565)
NetQ6_1: Q6.1 R8.1 R9.2 | length 133.6
  Bottom Layer w30: R8.1 R9.2 1281.5,2559.84 1288.74,2552.6 Q6.1
NetQ7_1: Q7.1 Q8.3 R10.1 | length 245.6
  Top Layer w20: v1(1570,2865) 1572.01,2862.99 Q7.1
  Bottom Layer w30: Q8.3 1426.34,2890 1427.09,2890.75 1427.09,2892.72 1451.93,2917.56 R10.1 1517.44,2917.56 v1(1570,2865)
NetQ8_1: Q8.1 R11.1 R12.2 | length 134.7
  Bottom Layer w30: R11.1 1215.33,2862.11 1279.67,2862.11 R12.2 1281.5,2861.77 1290.67,2852.6 Q8.1
NetQ9_1: Q9.1 Q10.3 R13.1 | length 245.6
  Top Layer w20: v1(1570,3165) 1572.01,3162.99 Q9.1
  Bottom Layer w30: Q10.3 1426.34,3190 1427.09,3190.75 1427.09,3192.72 1451.93,3217.56 R13.1 1517.44,3217.56 v1(1570,3165)
NetQ10_1: Q10.1 R14.1 R15.2 | length 134.7
  Bottom Layer w30: R14.1 R15.2 1281.5,3162.44 1291.34,3152.6 Q10.1
NetQ11_1: Q11.1 Q12.3 R16.1 | length 242.6
  Top Layer w20: v1(1570,3460) 1571.57,3458.43 1571.57,3400.68 Q11.1
  Bottom Layer w30: Q12.3 1426.34,3490 1427.09,3490.75 1427.09,3492.72 1451.93,3517.56 R16.1 1512.44,3517.56 v1(1570,3460)
NetQ12_1: Q12.1 R17.1 R18.2 | length 134.7
  Bottom Layer w30: R17.1 R18.2 1281.5,3462.44 1291.34,3452.6 Q12.1
NetQ13_1: Q13.1 Q14.3 R19.1 | length 255.5
  Top Layer w20: Q13.1 1575,3703.23 v1(1575,3770)
  Bottom Layer w30: Q14.3 1425.71,3792.24 1426.46,3792.99 1426.46,3794.96 1451.3,3819.8 R19.1 1525.2,3819.8 v1(1575,3770)
NetQ14_1: Q14.1 R20.1 R21.2 | length 134.1
  Bottom Layer w30: R20.1 R21.2 1281.5,3764.69 1291.34,3754.84 Q14.1
NetQ15_1: Q15.1 Q16.3 R22.1 | length 219.2
  Top Layer w20: v1(2650,2015) Q15.1
  Bottom Layer w30: v1(2650,2015) 2712.28,2015 2713.5,2013.78 2723.78,2013.78 R22.1 2768.07,2012.56 2792.91,1987.72 2792.91,1985.75 2793.66,1985 Q16.3
NetQ16_1: Q16.1 R23.1 R24.2 | length 134.7
  Bottom Layer w30: Q16.1 2928.66,2022.4 2938.5,2012.56 R24.2 R23.1
NetQ17_1: Q17.1 Q18.3 R25.1 | length 219.2
  Top Layer w20: v1(2650,2315) Q17.1
  Bottom Layer w30: v1(2650,2315) 2712.28,2315 2713.5,2313.78 2723.78,2313.78 R25.1 2768.07,2312.56 2792.91,2287.72 2792.91,2285.75 2793.66,2285 Q18.3
NetQ18_1: Q18.1 R26.1 R27.2 | length 134.7
  Bottom Layer w30: Q18.1 2928.66,2322.4 2938.5,2312.56 R27.2 R26.1
NetQ19_1: Q19.1 Q20.3 R28.1 | length 218.8
  Top Layer w20: v1(2650,2615) Q19.1
  Bottom Layer w30: v1(2650,2615) 2712.28,2615 2713.5,2613.78 2723.78,2613.78 R28.1 2771.1,2612.56 2793.54,2590.12 2793.54,2588.15 2794.29,2587.4 Q20.3
NetQ20_1: Q20.1 R29.1 R30.2 | length 134.1
  Bottom Layer w30: Q20.1 2928.66,2624.8 2938.5,2614.96 R30.2 R29.1
NetQ21_1: Q21.1 Q22.3 R31.1 | length 219.2
  Top Layer w20: v1(2650,2915) Q21.1
  Bottom Layer w30: v1(2650,2915) 2712.28,2915 2713.5,2913.78 2723.78,2913.78 R31.1 2768.07,2912.56 2792.91,2887.72 2792.91,2885.75 2793.66,2885 Q22.3
NetQ22_1: Q22.1 R32.1 R33.2 | length 134.7
  Bottom Layer w30: Q22.1 2928.66,2922.4 2938.5,2912.56 R33.2 R32.1
NetQ23_1: Q23.1 Q24.3 R34.1 | length 220.9
  Top Layer w20: v1(2650,3215) Q23.1
  Bottom Layer w30: v1(2650,3215) R34.1 2763.66,3215 2793.54,3185.12 2793.54,3183.15 2794.29,3182.4 Q24.3
NetQ24_1: Q24.1 R35.1 R36.2 | length 134.1
  Bottom Layer w30: Q24.1 2928.66,3219.8 2938.5,3209.96 R36.2 R35.1
NetQ25_1: Q25.1 Q26.3 R37.1 | length 223.8
  Top Layer w20: v1(2650,3510) Q25.1
  Bottom Layer w30: v1(2650,3510) 2712.28,3510 2713.5,3508.78 2723.78,3508.78 R37.1 2771.1,3507.56 2793.54,3485.12 2793.54,3483.15 2794.29,3482.4 Q26.3
NetQ26_1: Q26.1 R38.1 R39.2 | length 134.1
  Bottom Layer w30: Q26.1 2928.66,3519.8 2938.5,3509.96 R39.2 R38.1
NetQ27_1: Q27.1 Q28.3 R40.1 | length 219.2
  Top Layer w20: v1(2650,3815) Q27.1
  Bottom Layer w30: v1(2650,3815) 2709.68,3815 2713.5,3811.18 2723.78,3811.18 R40.1 2770.67,3809.96 2792.91,3787.72 2792.91,3785.75 2793.66,3785 Q28.3
NetQ28_1: Q28.1 R41.1 R42.2 | length 134.7
  Bottom Layer w30: Q28.1 2928.66,3822.4 2938.5,3812.56 R42.2 R41.1
NetR100_2: R100.2 S1.3
PWR_IN: S1.4 T1.1
SCK: MCU_ISP1.3 U2.28
pads on no net: J1.None J4.None U1.5 U2.17 U2.18 U2.21 U2.22 U2.25

## Polygon pours and split planes (outlines as drawn)
+12_HC on Top Layer "Top Layer-+12_HC" (solid, pour order 8): 2440,1050 2555,1165 2555,1655 2590,1690 3005,1690 3165,1850 3165,3930 2800,3930 2800,1875 2755,1830 1475,1830 1425,1880 1425,3930 1054.99,3930 1054.99,1834.82 1205.38,1690 1715,1690 2160,1245 2160,1095 2205,1050
PWR_IN on Top Layer "Top Layer-PWR_IN" (solid, pour order 6): 1055,1620 1705,1620 2060,1265 2060,1095 2015,1050 1055,1050
GND on Top Layer "Top Layer-GND" (solid, pour order 2): 1970,3250 2030.24,3310.24 2194.76,3310.24 2255,3250 2255,2495.47 2184.53,2425 2060,2425 1970,2515
PWR_IN on Bottom Layer "Bottom Layer-PWR_IN" (solid, pour order 12): 1055,1620 1705,1620 2060,1265 2060,1095 2015,1050 1055,1050
GND on Bottom Layer "Bottom Layer-GND" (solid, pour order 10): 2255,3250 2194.76,3310.24 2030.24,3310.24 1970,3250 1970,2145 2010,2105 2235,2105 2285,2055 2285,1590 2610,1265 2610,1072.5 3167.5,1072.5 3170,1070 3170,1630 2807.5,1630 2585,1852.5 2585,2165.47 2255,2495.47

## Silkscreen, mask and mechanical layers (free items; w line width, h text height)
Mechanical 1:
  lines w10: 1005,1005 1005,5645 1005,5715 3235,5715 3235,1005 1005,1005

## Text inside footprints (layer, text, board x,y; h text height)
MCU_ISP1: Top Overlay "6" at 2920,4385 h50 r90; Top Overlay "5" at 3020,4385 h50 r90; Top Overlay "2" at 2920,4025 h50 r90; Top Overlay "1" at 3020,4045 h50 r90
S1: Top Overlay "ACS77# / BFF" at 2290,1885 h60 r180